# Altium PCB FreidoraAireCukiMicro.PcbDoc
Units mil, origin at the board's own origin, x right, y up, seen from the top; angles counter-clockwise.
Board outline 3650 x 2850 mil, 2 copper layers (Top Layer, Bottom Layer); 65 components, 96 nets, 249 pads, 28 vias.
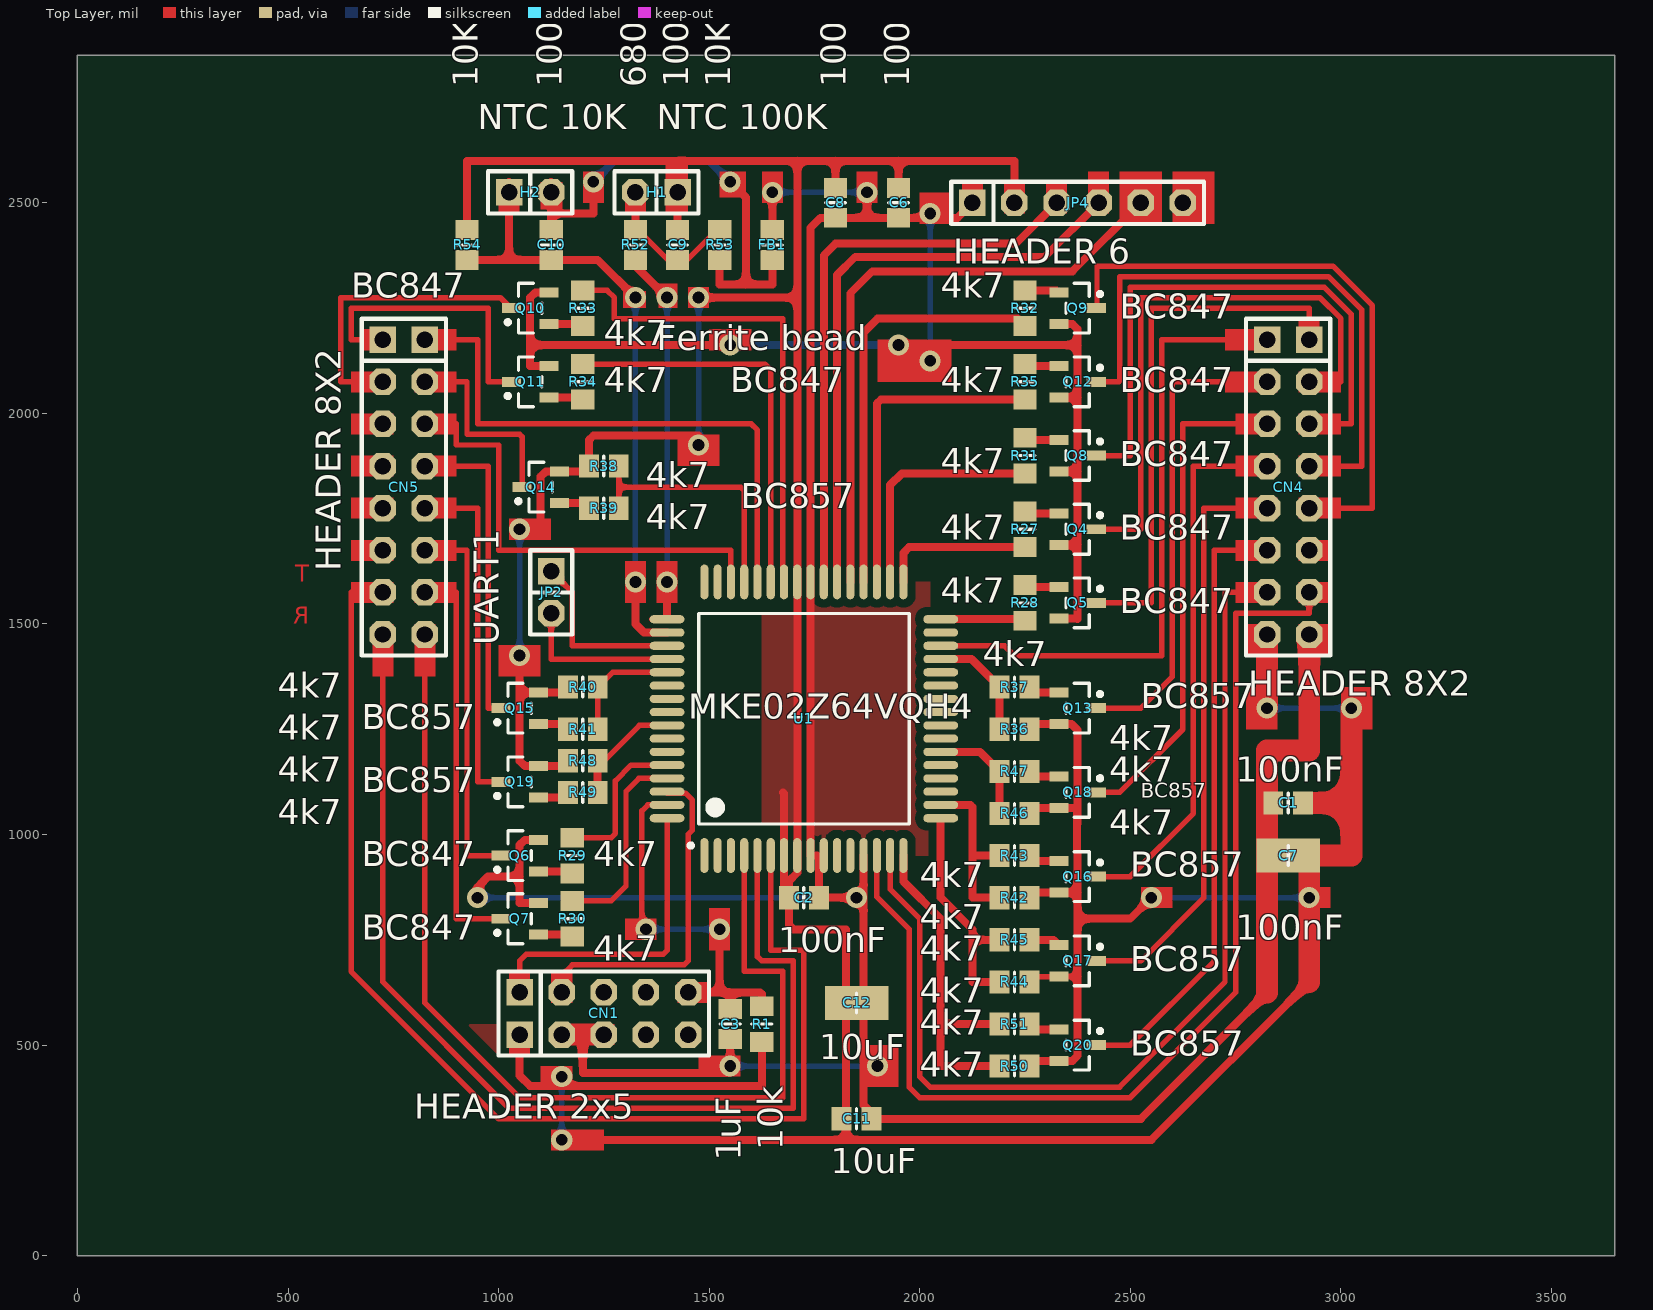
[diagram p0: Top Layer view]
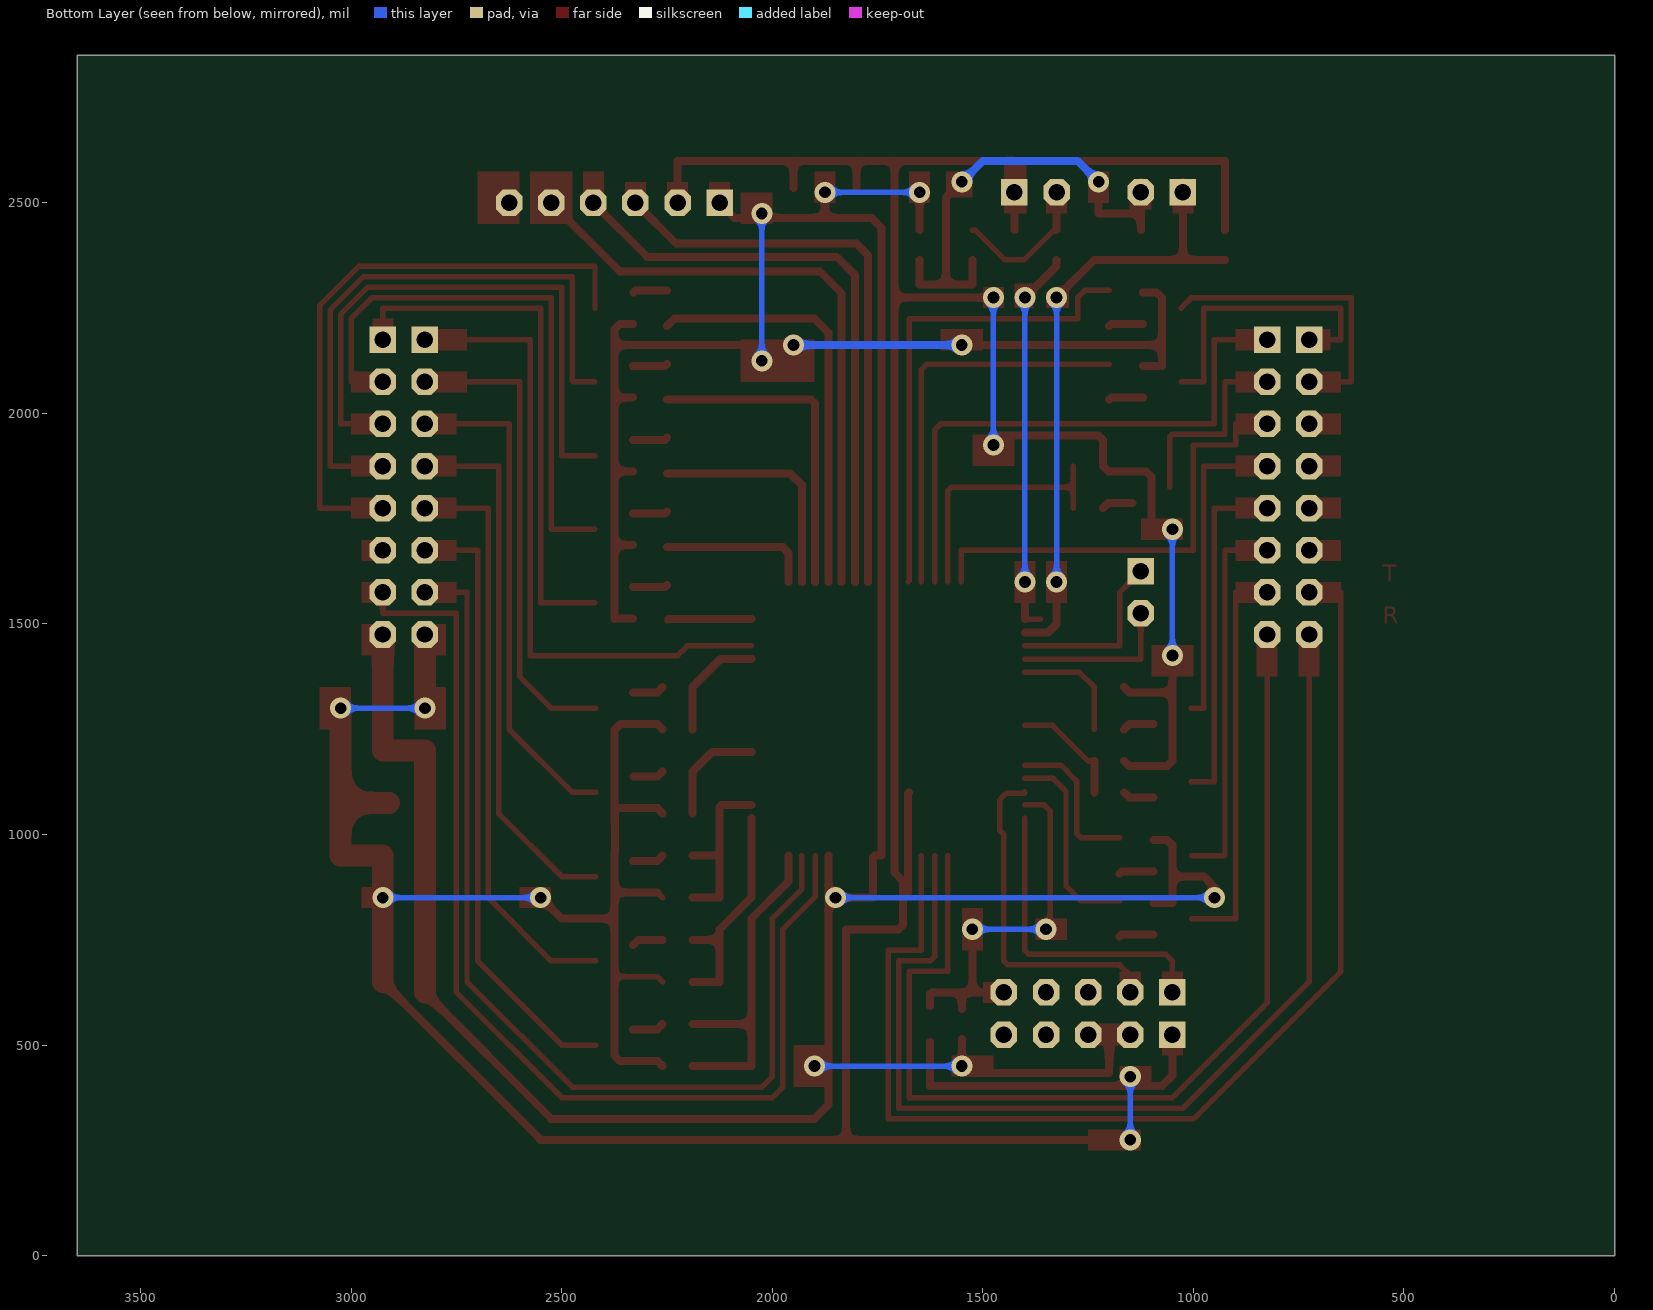
[diagram p1: Bottom Layer view, seen from below]

## Layer stack, top to bottom
Top Solder: solder mask 0.4, Solder Resist, Dk 3.5
Top Layer: signal copper 1.4
Dielectric1: dielectric 12.6, FR-4, Dk 4.8
Bottom Layer: signal copper 1.4
Bottom Solder: solder mask 0.4, Solder Resist, Dk 3.5

## Board outline
0,0 3650,0 3650,2850 0,2850

## Design rules (kind name [scope] priority, off if disabled: settings)
Clearance POLIGONOS [InPoly] p1: gap=20
Clearance [All] p2: gap=12
Clearance Clearance_1 [All] p3 off: gap=10
ComponentClearance [All] p1 off: gap=10 collisioncheckmode=3 verticalgap=10 showdistances=FALSE
FabricationTestPointUsage TestPointUsage [All] p1 off: valid=0 allowmultiple=FALSE
FabricationTestpoint Testpoint [All] p1: side=3 testpointundercomponent=TRUE minsize=40 maxsize=100 preferedsize=60 minholesize=0 maxholesize=40 preferedholesize=32 testpointgrid=1 allowsidetop=TRUE allowsidebottom=TRUE usegrid=TRUE gridtolerance=0.01
HoleSize [All] p1: absolutevalues=TRUE maxlimit=200 minlimit=1 maxpercent=80.000 minpercent=20.000
MinimumSolderMaskSliver [All] p1 off: minsoldermaskwidth=10
PlaneConnect [All] p1: planeconnectstyle=Relief reliefexpansion=20 reliefentries=4 reliefconductorwidth=14 reliefairgap=10
PolygonConnect [All] p1: connectstyle=Relief reliefconductorwidth=10 reliefentries=4 polygonreliefangle="90 Angle" airgapwidth=10
RoomDefinition FreidoraAireCukiDigLeds [InComponentClass('FreidoraAireCukiDigLeds')] p1: confinementstyle=ConfineIn formatcopy=TRUE lockcomponents=FALSE outline -10675,-9825 -8675,-9825 -8675,-8825 -10675,-8825
RoomDefinition FreidoraAireCukiMicro [InComponentClass('FreidoraAireCukiMicro')] p2: confinementstyle=ConfineIn formatcopy=TRUE lockcomponents=FALSE outline -200,-225 3825,-225 3825,2950 -200,2950
RoutingCorners [All] p1: cornerstyle=45-Degree minsetback=25 maxsetback=100
RoutingLayers [All] p1: top layer_v5=FALSE bottom layer_v5=FALSE
RoutingPriority [All] p1: routingpriority=2
RoutingVias [All] p1: holewidth=28 width=50 viastyle="Through Hole" minholewidth=28 minwidth=50 maxholewidth=28 maxwidth=55
ShortCircuit [All] p1 off: allowed=FALSE
SilkToSilkClearance [All] p1 off: silktosilkclearance=10
SilkToSolderMaskClearance SilkscreenOverComponentPads [IsPad] p1 off: minsilkscreentomaskgap=10 clearancetoexposedcopper=TRUE
SolderMaskExpansion [All] p1: expansion=4
Width "Width 39" [All] p1 off: maxlimit=300 minlimit=13 preferedwidth=39
Width "Width 96" [All] p2 off: maxlimit=300 minlimit=12 preferedwidth=96
Width "Width 19" [All] p3: maxlimit=300 minlimit=12 preferedwidth=19
Width "Width 300" [All] p4 off: maxlimit=300 minlimit=10 preferedwidth=300
Width "Width 12" [All] p5 off: maxlimit=300 minlimit=10 preferedwidth=12
Width "Width 65" [All] p6 off: maxlimit=300 minlimit=10 preferedwidth=65
Width "Width 150" [All] p7 off: maxlimit=300 minlimit=10 preferedwidth=150
Width "Width 26" [All] p8 off: maxlimit=300 minlimit=10 preferedwidth=26
Width "Width 13" [All] p9 off: maxlimit=300 minlimit=10 preferedwidth=13
Width "Width 52" [All] p10 off: maxlimit=300 minlimit=10 preferedwidth=52
18 further rules are at their usual default settings.

## Components (designator, comment, footprint, x,y, rotation, side; value= is the part's Value field where it differs from the comment)
C1 "100nF" C-0805_N#1 2875,1075 r180 top
C2 "100nF" C-0805_N#1 1725,850 r0 top
C3 "1uF" C-0805_N#1 1550,550 r270 top
C6 "100nF" C-0805_N#1 1950,2500 r270 top
C7 "100nF" C-0805_N#2 2875,950 r180 top
C8 "100nF" C-0805_N#1 1800,2500 r270 top
C9 "100nF" C-0805_N#1 1425,2400 r90 top
C10 "100nF" C-0805_N#1 1125,2400 r270 top
C11 "10uF" C-0805_N#1 1850,325 r180 top
C12 "10uF" C-0805_N#2 1850,600 r180 top
CN1 "HEADER 2x5" SIP2X5 1050,525 r180 top
CN4 "HEADER 8X2" SIP2X8 2825,2175 r90 top
CN5 "HEADER 8X2" SIP2X8 725,2175 r90 top
FB1 "Ferrite bead" C-0805_N#1 1650,2400 r270 top
H1 "NTC 100K" SIP2 1425,2525 r180 top
H2 "NTC 10K" SIP2 1025,2525 r0 top
JP2 "UART1" SIP2 1125,1625 r270 top
JP4 "HEADER 6" SIP6 2125,2500 r0 top
Q4 "BC847" SOT23_N 2375,1725 r0 top
Q5 "BC847" SOT23_N 2375,1550 r0 top
Q6 "BC847" SOT23_N 1050,950 r180 top
Q7 "BC847" SOT23_N 1050,800 r180 top
Q8 "BC847" SOT23_N 2375,1900 r0 top
Q9 "BC847" SOT23_N 2375,2250 r0 top
Q10 "BC847" SOT23_N 1075,2250 r180 top
Q11 "BC847" SOT23_N 1075,2075 r180 top
Q12 "BC847" SOT23_N 2375,2075 r0 top
Q13 "BC857" SOT23_N 2375,1300 r0 top
Q14 "BC857" SOT23_N 1100,1825 r180 top
Q15 "BC857" SOT23_N 1050,1300 r180 top
Q16 "BC857" SOT23_N 2375,900 r0 top
Q17 "BC857" SOT23_N 2375,700 r0 top
Q18 "BC857" SOT23_N 2375,1100 r0 top
Q19 "BC857" SOT23_N 1050,1125 r180 top
Q20 "BC857" SOT23_N 2375,500 r0 top
R1 "10k" R-0805_N_WAVE 1625,550 r270 top
R27 "4k7" R-0805_N_WAVE 2250,1725 r270 top
R28 "4k7" R-0805_N_WAVE 2250,1550 r270 top
R29 "4k7" R-0805_N_WAVE 1175,950 r90 top
R30 "4k7" R-0805_N_WAVE 1175,800 r90 top
R31 "4k7" R-0805_N_WAVE 2250,1900 r270 top
R32 "4k7" R-0805_N_WAVE 2250,2250 r270 top
R33 "4k7" R-0805_N_WAVE 1200,2250 r90 top
R34 "4k7" R-0805_N_WAVE 1200,2075 r90 top
R35 "4k7" R-0805_N_WAVE 2250,2075 r270 top
R36 "4k7" R-0805_N 2225,1250 r0 top
R37 "4k7" R-0805_N 2225,1350 r0 top
R38 "4k7" R-0805_N 1250,1875 r180 top
R39 "4k7" R-0805_N 1250,1775 r180 top
R40 "4k7" R-0805_N 1200,1350 r180 top
R41 "4k7" R-0805_N 1200,1250 r180 top
R42 "4k7" R-0805_N 2225,850 r0 top
R43 "4k7" R-0805_N 2225,950 r0 top
R44 "4k7" R-0805_N 2225,650 r0 top
R45 "4k7" R-0805_N 2225,750 r0 top
R46 "4k7" R-0805_N 2225,1050 r0 top
R47 "4k7" R-0805_N 2225,1150 r0 top
R48 "4k7" R-0805_N 1200,1175 r180 top
R49 "4k7" R-0805_N 1200,1100 r180 top
R50 "4k7" R-0805_N 2225,450 r0 top
R51 "4k7" R-0805_N 2225,550 r0 top
R52 "680" R-0805_N 1325,2400 r270 top
R53 "10K" R-0805_N 1525,2400 r90 top
R54 "10K" R-0805_N 925,2400 r90 top
U1 "MKE02Z64VQH4" QFP64 1725,1275 r90 top

## Footprints (in the part's own frame and the unit in brackets; to place one, negate y for a bottom-side part, rotate by r counter-clockwise, add the part's x,y. Pads: shape width x height; smd on the part's side, far side on the other; paste and mask are expansions set on the pad)
C-0805_N#1 [mm] "Chip Capacitor, Body 2.0x1.2mm, IPC Medium Density"
  rect 1.2x1.4 smd: 1(-0.9,0) 2(0.9,0)
  silkscreen extent 0,-0.6 0,0.6, body extent -1.1,-0.72 1.1,0.73, height 1.34
C-0805_N#2 [mm] "Chip Capacitor, Body 2.0x1.2mm, IPC Medium Density"
  rect 2.032x2.032 smd: 1(-0.9,0) 2(0.9,0)
  silkscreen extent 0,-0.6 0,0.6, body extent -1.1,-0.72 1.1,0.73, height 1.34
QFP64 [mm] "QFP, 64-Leads, Body 14x14mm, Pitch 0.8mm, IPC Medium Density"
  oval 2.1x0.489 smd: 1(-8.25,6) 2(-8.25,5.2) 3(-8.25,4.4) 4(-8.25,3.6) 5(-8.25,2.8) 6(-8.25,2) 7(-8.25,1.2) 8(-8.25,0.4) 9(-8.25,-0.4) 10(-8.25,-1.2) 11(-8.25,-2) 12(-8.25,-2.8) 13(-8.25,-3.6) 14(-8.25,-4.4) 15(-8.25,-5.2) 16(-8.25,-6) 33(8.25,-6) 34(8.25,-5.2) 35(8.25,-4.4) 36(8.25,-3.6) 37(8.25,-2.8) 38(8.25,-2) 39(8.25,-1.2) 40(8.25,-0.4) 41(8.25,0.4) 42(8.25,1.2) 43(8.25,2) 44(8.25,2.8) 45(8.25,3.6) 46(8.25,4.4) 47(8.25,5.2) 48(8.25,6)
  oval 0.489x2.1 smd: 17(-6,-8.25) 18(-5.2,-8.25) 19(-4.4,-8.25) 20(-3.6,-8.25) 21(-2.8,-8.25) 22(-2,-8.25) 23(-1.2,-8.25) 24(-0.4,-8.25) 25(0.4,-8.25) 26(1.2,-8.25) 27(2,-8.25) 28(2.8,-8.25) 29(3.6,-8.25) 30(4.4,-8.25) 31(5.2,-8.25) 32(6,-8.25) 49(6,8.25) 50(5.2,8.25) 51(4.4,8.25) 52(3.6,8.25) 53(2.8,8.25) 54(2,8.25) 55(1.2,8.25) 56(0.4,8.25) 57(-0.4,8.25) 58(-1.2,8.25) 59(-2,8.25) 60(-2.8,8.25) 61(-3.6,8.25) 62(-4.4,8.25) 63(-5.2,8.25) 64(-6,8.25)
  silkscreen extent -7.77,-6.35 6.35,6.95, body extent -7.9,-7.9 7.9,7.9, height 2.9
R-0805_N [mm] "Chip Resistor, Body 2.0x1.2mm, IPC Medium Density"
  rect 1.2x1.4 smd: 1(-0.9,0) 2(0.9,0)
  silkscreen extent 0,-0.6 0,0.6, body extent -1.1,-0.67 1.1,0.68, height 0.69
R-0805_N_WAVE [mm] "Chip Resistor, Body 2.0x1.2mm, IPC Medium Density, Wave soldering"
  rect 1.2x1.4 smd: 1(-1.075,0) 2(1.075,0)
  silkscreen extent 0,-0.6 0,0.6, body extent -1.1,-0.67 1.1,0.68, height 0.69
SIP2 [mil]
  rect 63x63 hole 39: 1(0,0)
  oct 63x63 hole 39: 2(100,0)
  silkscreen extent -50,-50 150,50
SIP2X5 [mil]
  rect 63x63 hole 39: 1(0,0) 2(0,-100)
  oct 63x63 hole 39: 3(-100,0) 4(-100,-100) 5(-200,0) 6(-200,-100) 7(-300,0) 8(-300,-100) 9(-400,0) 10(-400,-100)
  silkscreen extent -450,-150 50,50, body extent -450,-148 50,48, height 336
SIP2X8 [mil]
  rect 63x63 hole 39: 1(0,0) 2(0,-100)
  oct 63x63 hole 39: 3(-100,0) 4(-100,-100) 5(-200,0) 6(-200,-100) 7(-300,0) 8(-300,-100) 9(-400,0) 10(-400,-100) 11(-500,0) 12(-500,-100) 13(-600,0) 14(-600,-100) 15(-700,0) 16(-700,-100)
  silkscreen extent -750,-150 50,50
SIP6 [mil]
  rect 63x63 hole 39: 1(0,0)
  oct 63x63 hole 39: 2(100,0) 3(200,0) 4(300,0) 5(400,0) 6(500,0)
  silkscreen extent -50,-50 550,50
SOT23_N [mm] "SOT23, 3-Leads, Body 2.9x1.3mm, Pitch 0.95mm, Lead Span 2.3mm - Reverse Pinning, IPC Medium Density"
  rect 1.15x0.6 smd: 1(-1.125,0.95) 2(-1.125,-0.95) 3(1.125,0)
  silkscreen extent -0.7,-1.5 1.48,1.5, body extent -1.4,-1.45 1.4,1.45, height 1.29

## Part data
C1 C2 C3 C6 C7 C8 C9 C10 C11 C12: library part CAP, "Non polarized capacitor"
CN1: library part "HEADER 5X2"
CN4 CN5: "HEADER DE 2 X8"
H1 H2 JP2: library part "HEADER 2"
Q4 Q5 Q6 Q7 Q8 Q9 Q10 Q11 Q12: "NPN transistor bipolar"
Q13 Q14 Q15 Q16 Q17 Q18 Q19 Q20: "PNP bipolar transistor"
R1 R27 R28 R29 R30 R31 R32 R33 R34 R35 R36 R37 R38 R39 R40 R41 R42 R43 R44 R45 R46 R47 R48 R49 R50 R51 R52 R53 R54: library part "Res SMD 0805", "Resistor SMD 0805"
U1: "IC MCU 32BIT 64KB FLASH 64QFP"

## Via types
v1: diameter 50, hole 28, Top Layer to Bottom Layer, 28 vias

## Nets (pads, with @x,y where several pads share a name; then routed paths per layer and width w, separated by ;. In a path a pad name is that pad's centre, name@x,y a point inside that pad or via, vN(x,y) a via of type N, cw(c..) or ccw(c..) an arc to the next point about the centre after c; other vN are vias at no path point)
A: R36.1 R37.1 U1.29 | length 267.4
  Top Layer w19: U1.29 2122.83,1416.73 R37.1 R36.1
AGND: C10.1 FB1.2 H2.2 R53.1 | length 1157.7
  Top Layer w19: C10.1 1125,2475 ; H2.2@1125,2550 1125,2475 ; v1(1225,2550) 1225,2475 1125,2475 ; R53.1 1525,2306 1587.5,2306 ; v1(1550,2550) 1587.5,2512.5 1587.5,2306 ; FB1.2 1650,2306 1587.5,2306
  Bottom Layer w19: v1(1225,2550) 1275,2600 1500,2600 v1(1550,2550)
B: R38.1 R39.1 U1.45 | length 618.2
  Top Layer w13: R39.1 1285.43,1825 ; R38.1 1285.43,1825 ; U1.45 1583.27,1816.73 1575,1825 1285.43,1825
BAJAR: CN4.14 U1.14 | length 2595.9
  Top Layer w13: U1.14 1898.23,851.77 1974.8,775.2 1974.8,400.2 2000,375 2500,375 2750,625 2750,1525 2925,1525 CN4.14
BUZZER: JP4.3 U1.39 | length 1379.9
  Top Layer w19: U1.39 1772.24,2375.24 1800,2403 2228,2403 JP4.3
C: R40.1 R41.1 U1.53 | length 279.4
  Top Layer w13: R41.1 R40.1 1270.67,1385.24 U1.53
D: R42.1 R43.1 U1.18 | length 421.8
  Top Layer w19: U1.18 2120.28,1070.28 2125,1065.55 2125,950 ; R42.1 2125,850 2125,950 ; R43.1 2125,950
DIG1: 
DIG2: 
DIG3: 
DIGITO1: CN4.1 U1.30 | length 1534.8
  Top Layer w13: U1.30 2201.77,1448.23 2225,1425 2575,1425 2575,2175 CN4.1
DIGITO2: CN5.2 U1.44 | length 1356.3
  Top Layer w13: CN5.2 950,2175 950,1975 1600,1975 1614.76,1960.24 U1.44
DIGITO3: CN5.6 U1.46 | length 1102
  Top Layer w13: CN5.6 900,1975 900,1925 1000,1925 1000,1675 1551.77,1675 U1.46
DP: R50.1 R51.1 U1.16 | length 816.1
  Top Layer w19: U1.16 1961.22,888.78 2050,800 2050,550 ; R50.1 2050,450 2050,550 ; R51.1 2050,550
E: R44.1 R45.1 U1.17 | length 549.1
  Top Layer w19: U1.17 2049.8,850.2 2125,775 2125,750 ; R44.1 2125,650 2125,750 ; R45.1 2125,750
F: R46.1 R47.1 U1.22 | length 258.9
  Top Layer w19: U1.22 2143.31,1196.26 R47.1 R46.1
FAN: JP4.4 U1.38 | length 1443.1
  Top Layer w19: U1.38 1803.74,2328.74 1847,2372 2297,2372 JP4.4 JP4.4@2425,2478
G: R48.1 R49.1 U1.57 | length 274.7
  Top Layer w13: R48.1 1250,1175 1334.25,1259.25 U1.57
  Top Layer w19: R49.1 R48.1
GND: C1.2 C2.2 C3.2 C6.2 C7.2 C8.2 C11.1 C12.1 CN1.3 CN1.5 CN4.16 FB1.1 JP4.1 Q4.2 Q5.2 Q6.2 Q7.2 Q8.2 Q9.2 Q10.2 Q11.2 Q12.2 U1.9 U1.10 U1.13 U1.40 | length 10231.6
  Top Layer w19: v1(950,850) 950,875 975,900 1050,900 ; 1075,2162.44 v1(1550,2162.44) ; Q7.2 1050,837.4 1050,900 ; Q6.2 1062.4,987.4 1050,975 1050,900 ; Q11.2 1075,2112.4 1075,2275 1087.4,2287.4 Q10.2 ; 1200,525 1200,434 1550,434 C3.2 ; FB1.1 v1(1650,2525) ; U1.13 v1@1866.73,850 ; v1(1875,2525) 1875,2464.57 ; v1(1950,2162.44) 2025,2162.44 ; v1(2025,2125) 2025,2162.44 ; v1(2025,2475) v1@2025,2464.57 ; JP4.1 2089.57,2464.57 v1@2025,2464.57 ; Q5.2 2374.22,1512.6 2375,1511.81 2375,1687.6 ; Q4.2 2375,1687.6 ; Q8.2 2375,1862.6 ; Q12.2 2375,2037.6 ; Q9.2 2362.4,2212.6 2375,2200 2375,2037.6 ; 2375,2162.44 2025,2162.44 ; 2825,625 2525,325 1900,325 1866.73,358.27 v1@1866.73,850 ; v1@1866.73,850 C2.2 1760.43,946.26 1756.5,950.2 U1.9 U1.40 1740.75,2440.75 1764.57,2464.57 C8.2 1875,2464.57 ; 1875,2464.57 C6.2 v1@2025,2464.57 ; 2375,1687.6 2375,1862.6 ; 2375,1862.6 2375,2037.6
  Top Layer w52: CN1.3 1200,525 CN1.5 ; 2825,625 2825,1200 2925,1200 CN4.16
  Bottom Layer w13: v1(950,850) v1(1850,850) ; v1(1550,450) v1(1900,450) ; v1(1650,2525) v1(1875,2525) ; v1(2025,2125) v1(2025,2475)
  Bottom Layer w19: v1(1550,2162.44) v1@1937.56,2162.44
HEAT: JP4.5 U1.37 | length 1464.2
  Top Layer w19: U1.37 1835.24,2285.24 1887.44,2337.44 2362.44,2337.44 JP4.5
LED1: R27.2 U1.33 | length 363.6
  Top Layer w19: U1.33 1961.22,1668.9 1975,1682.68 R27.2
LED1_DR: CN4.4 Q4.3 | length 1374.6
  Top Layer w13: Q4.3@2421.06,1725 2525,1725 2525,2275 2950,2275 3000,2225 3000,2075 CN4.4
LED2: R28.2 U1.32 | length 201.7
  Top Layer w13: R28.2@2246.46,1511.22 R28.2
  Top Layer w19: U1.32 R28.2@2246.46,1511.22
LED2_DR: CN4.2 Q5.3 | length 1278.9
  Top Layer w13: Q5.3@2421.06,1550 2550,1550 2550,2250 2925,2250 CN4.2
LED3: R29.2 U1.60 | length 369.8
  Top Layer w13: R29.2 1267.32,992.32 1277.56,1002.56 1277.56,1127.56 1314.76,1164.76 U1.60
LED3_DR: CN5.12 Q6.3 | length 903.9
  Top Layer w13: CN5.12 925,1675 925,950 Q6.3@1003.94,950
LED4: R30.2 U1.61 | length 477.5
  Top Layer w13: R30.2 1267.32,842.32 1302.56,877.56 1302.56,1102.56 1333.27,1133.27 U1.61
LED4_DR: CN5.14 Q7.3 | length 953.9
  Top Layer w13: CN5.14 900,1575 900,800 Q7.3@1003.94,800
LED5: R31.2 U1.34 | length 561.8
  Top Layer w19: U1.34 1929.72,1829.72 1957.68,1857.68 R31.2
LED5_DR: CN4.6 Q8.3 | length 1391.1
  Top Layer w13: Q8.3@2421.06,1900 2500,1900 2500,2300 2960.36,2300 3025,2235.36 3025,1975 CN4.6
LED6: R32.2 U1.36 | length 996.2
  Top Layer w19: U1.36 1866.73,2191.73 1900,2225 2232.68,2225 R32.2
LED6_DR: CN4.10 Q9.3 | length 1425.5
  Top Layer w13: Q9.3@2421.06,2250 2421.06,2346.06 2425,2350 ; 2421.06,2350 2981.07,2350 3075,2256.07 3075,1775 CN4.10
LED7: R33.2 U1.42 | length 1158.5
  Top Layer w13: R33.2 1257.68,2292.32 1275,2275 1275,2225 1675,2225 1675,1602.56 U1.42
LED7_DR: CN5.3 Q10.3 | length 714.3
  Top Layer w13: CN5.3 625,2075 625,2275 1003.94,2275 Q10.3@1028.94,2250
LED8: R34.2 U1.43 | length 955.8
  Top Layer w13: R34.2 1632.68,2117.32 1646.26,2103.74 U1.43
LED8_DR: CN5.1 Q11.3 | length 703.9
  Top Layer w13: CN5.1 650,2175 650,2250 975,2250 975,2075 Q11.3@1028.94,2075
LED9: R35.2 U1.35 | length 779.1
  Top Layer w19: U1.35 1898.23,2023.23 1907.68,2032.68 R35.2
LED9_DR: CN4.8 Q12.3 | length 1406.3
  Top Layer w13: Q12.3@2421.06,2075 2473.03,2075 2475,2076.97 2475,2325 2970.71,2325 3050,2245.71 3050,1875 CN4.8
MODO: CN5.16 U1.4 | length 2485.1
  Top Layer w13: CN5.16 825,600 1050,375 1675,375 1675,675 1583.27,675 U1.4
NetC9_1: C9.1 H1.2 R52.1 R53.2 | length 348.3
  Top Layer w13: R52.1 1331.48,2435.43 1402.34,2364.57 C9.1 1447.66,2364.57 1518.52,2435.43 R53.2
  Top Layer w19: R52.1 H1.2
NetDG1_1: 
NetDG1_2: 
NetDG1_3: 
NetDG1_4: 
NetDG1_5: 
NetDG1_7: 
NetDG1_10: 
NetDG1_11: 
NetJP2_1: JP2.1 U1.51 | length 422.7
  Top Layer w13: JP2.1 1175,1575 1175,1448.23 U1.51
NetJP2_2: JP2.2 U1.52 | length 383.5
  Top Layer w13: JP2.2 1125,1416.73 U1.52
NetLED1_1: 
NetLED2_1: 
NetLED3_1: 
NetLED4_1: 
NetLED5_1: 
NetLED6_1: 
NetLED7_1: 
NetLED8_1: 
NetLED9_1: 
NetQ1_1: 
NetQ2_1: 
NetQ3_1: 
NetQ4_1: Q4.1 R27.1 | length 82.7
  Top Layer w19: R27.1 2254.92,1762.4 Q4.1
NetQ5_1: Q5.1 R28.1 | length 82.7
  Top Layer w19: R28.1 2254.92,1587.4 Q5.1
NetQ6_1: Q6.1 R29.1 | length 82.7
  Top Layer w19: Q6.1 1170.08,912.6 R29.1
NetQ7_1: Q7.1 R30.1 | length 82.7
  Top Layer w19: Q7.1 1170.08,762.6 R30.1
NetQ8_1: Q8.1 R31.1 | length 82.7
  Top Layer w19: R31.1 2254.92,1937.4 Q8.1
NetQ9_1: Q9.1 R32.1 | length 81.8
  Top Layer w19: R32.1 2324.8,2292.32 Q9.1@2329.72,2287.4
NetQ10_1: Q10.1 R33.1 | length 82.7
  Top Layer w19: Q10.1 1195.08,2212.6 R33.1
NetQ11_1: Q11.1 R34.1 | length 82.7
  Top Layer w19: Q11.1 1195.08,2037.6 R34.1
NetQ12_1: Q12.1 R35.1 | length 82.7
  Top Layer w19: R35.1 2254.92,2112.4 Q12.1
NetQ13_1: Q13.1 R37.2 | length 75.5
  Top Layer w19: R37.2 2273.03,1337.4 Q13.1
NetQ14_1: Q14.1 R39.2 | length 75.5
  Top Layer w19: Q14.1 1201.97,1787.6 R39.2
NetQ15_1: Q15.1 R41.2 | length 75.5
  Top Layer w19: Q15.1 1151.97,1262.6 R41.2
NetQ16_1: Q16.1 R43.2 | length 75.5
  Top Layer w19: R43.2 2273.03,937.4 Q16.1
NetQ17_1: Q17.1 R45.2 | length 75.5
  Top Layer w19: R45.2 2318.11,750 Q17.1
NetQ18_1: Q18.1 R47.2 | length 74.5
  Top Layer w19: R47.2 2273.03,1137.4 Q18.1@2329.72,1137.4
NetQ19_1: Q19.1 R49.2 | length 75.4
  Top Layer w19: Q19.1 1152.17,1087.6 R49.2
NetQ20_1: Q20.1 R51.2 | length 75.5
  Top Layer w19: R51.2 2273.03,537.4 Q20.1
NTC_10K: C10.2 H2.1 R54.1 U1.50 | length 1570.7
  Top Layer w19: R54.1 1025,2364.57 ; H2.1@1025,2550 1025,2364.57 ; C10.2 1235.43,2364.57 v1(1325,2275) ; 1214.57,2364.57 1025,2364.57 ; v1(1325,1600) 1325,1500 1345.28,1479.72 U1.50
  Bottom Layer w13: v1(1325,1600) v1(1325,2275)
ONOFF: CN5.13 U1.6 | length 2948.9
  Top Layer w13: 650,825 650,1575 CN5.13 ; 650,875 650,675 1000,325 1725,325 1725,725 1646.26,725 U1.6
RESET: C3.1 CN1.10 R1.1 U1.63 | length 920.7
  Top Layer w13: v1(1350,775) 1340.36,784.64 1340.36,1055.91 1354.72,1070.28 U1.63
  Top Layer w19: CN1.10 1525,625 ; v1(1525,775) 1525,625 ; C3.1 1550,625 ; R1.1 1625,621.16 1621.16,625 1550,625 ; 1525,625 1550,625
  Bottom Layer w13: v1(1350,775) v1(1525,775)
SEG_A: CN4.3 Q13.3 | length 1136.8
  Top Layer w13: Q13.3 2525,1300 2600,1375 2600,2075 CN4.3
SEG_B: CN5.4 Q14.3 | length 477.4
  Top Layer w13: CN5.4 925,2075 925,1950 1050,1950 1055.71,1944.29 Q14.3
SEG_C: CN5.8 Q15.3 | length 755.7
  Top Layer w13: CN5.8 975,1875 975,1300 Q15.3
SEG_D: CN4.7 Q16.3 | length 1292.8
  Top Layer w13: Q16.3 2500,900 2650,1050 2650,1875 CN4.7
SEG_DP: CN4.11 Q20.3 | length 1463.6
  Top Layer w13: Q20.3 2500,500 2700,700 2700,1675 CN4.11
SEG_E: CN4.9 Q17.3 | length 1392.8
  Top Layer w13: Q17.3 2525,700 2675,850 2675,1775 CN4.9
SEG_F: CN4.5 Q18.3 | length 1192.8
  Top Layer w13: Q18.3 2475,1100 2625,1250 2625,1975 CN4.5
SEG_G: CN5.10 Q19.3 | length 830.7
  Top Layer w13: CN5.10 950,1775 950,1125 Q19.3
SUBIR: CN4.13 U1.15 | length 2418.2
  Top Layer w13: U1.15 1929.72,870.28 1999.8,800.2 1999.8,425.2 2025,400 2475,400 2725,650 2725,1575 CN4.13
SWDCLK: CN1.4 U1.62 | length 810.9
  Top Layer w13: CN1.4 1150,665.56 1175,690.56 1440.56,690.56 1450,700 1450,1000.62 1460.04,1010.65 1460.04,1081.93 1443.56,1098.4 1400.2,1098.4 U1.62
SWDIO: CN1.2 U1.64 | length 749.2
  Top Layer w13: CN1.2 1050,700 1065.56,715.56 1390.56,715.56 1400,725 1400,874.8 1400.2,875 U1.64
TEMPERATURA: R52.2 U1.49 | length 920.9
  Top Layer w13: U1.49@1363.78,1511.22 U1.49
  Top Layer w19: R52.2 1325,2350 v1(1400,2275) ; v1(1400,1600) 1400.2,1599.8 U1.49
  Bottom Layer w13: v1(1400,1600) v1(1400,2275)
TIEMPO: CN5.15 U1.5 | length 2653.7
  Top Layer w13: 725,700 CN5.15 ; 725,750 725,650 1025,350 1700,350 1700,700 1625,700 1614.76,710.24 U1.5
VCC: C1.1 C2.1 C6.1 C7.1 C8.1 C9.2 C11.2 C12.2 CN1.1 CN4.15 H1.1 JP4.2 Q13.2 Q14.2 Q15.2 Q16.2 Q17.2 Q18.2 Q19.2 Q20.2 R1.2 R36.2 R38.2 R40.2 R42.2 R44.2 R46.2 R48.2 R50.2 R54.2 U1.7 U1.8 U1.41 | length 12751.8
  Top Layer w13: R44.2 2273.03,662.6 Q17.2 2374.85,662.6 ; R42.2 R42.2@2273.03,862.6
  Top Layer w19: R54.2 925,2600 1425,2600 ; CN1.1 1050,428 1075,403 1625,403 R1.2 ; 1050,1337.4 Q15.2 1151.97,1337.4 R40.2 ; v1(1050,1425) 1050,1175 1062.6,1162.4 Q19.2 1151.97,1162.4 R48.2 ; v1(1050,1725) 1100,1725 1100,1850 1112.4,1862.4 Q14.2 1201.97,1862.4 R38.2 1214.57,1936.57 1225,1947 1475,1947 v1(1475,1925) ; v1(1150,275) 1825,275 ; C9.2 H1.1@1425,2550 ; v1(1475,2275) 1709.25,2275 ; 1675,1100 1677.76,1097.24 U1.7 1677.76,861.81 C2.1 ; C8.1 1800,2600 ; C6.1 1950,2600 ; JP4.2 2225,2600 1950,2600 ; R50.2 2273.03,462.6 Q20.2 2362.6,462.6 2374.85,474.85 2374.85,662.6 2374.85,800 ; R46.2 2273.03,1062.6 Q18.2 2373.97,1062.6 2373.97,1025 ; R36.2 2273.03,1262.6 Q13.2 2360.43,1262.6 2374.85,1248.19 2374.85,1025.87 2373.97,1025 ; R42.2@2273.03,862.6 Q16.2 2374.85,862.6 ; v1(2550,850) 2500,800 2374.85,800 ; 2925,650 2550,275 1825,275 ; H1.1@1425,2550 1425,2600 ; H1.1@1425,2550 1425,2600 ; 1425,2600 1709.25,2600 ; C2.1 1689.57,889.57 1709.25,909.25 U1.8 U1.41 1709.25,2275 ; C2.1 1689.57,785.43 1700,775 1825,775 1825,275 ; 1709.25,2275 1709.25,2600 ; 1709.25,2600 1800,2600 ; 1800,2600 1950,2600 ; 2373.97,1025 2373.97,959.87 2374.85,958.99 2374.85,862.6 ; 2374.85,800 2374.85,862.6
  Top Layer w52: v1(2825,1300) CN4.15 ; C1.1 3025,1075 ; 2925,650 2925,950 3025,950 3025,1075 ; v1(3025,1300) 3025,1075
  Bottom Layer w13: v1(1050,1425) v1(1050,1725) ; v1(1150,275) v1(1150,425) ; v1(1475,1925) v1(1475,2275) ; v1(2550,850) v1(2925,850) ; v1(2825,1300) v1(3025,1300)
pads on no net: CN1.6 CN1.7 CN1.8 CN1.9 CN4.12 CN5.5 CN5.7 CN5.9 CN5.11 JP4.6 U1.1 U1.2 U1.3 U1.11 U1.12 U1.19 U1.20 U1.21 U1.23 U1.24 U1.25 U1.26 U1.27 U1.28 U1.31 U1.47 U1.48 U1.54 U1.55 U1.56 U1.58 U1.59

## Polygon pours and split planes (outlines as drawn)
VCC on Top Layer "Top Layer-No Net" (solid, pour order 7): 1709.25,1525 1625,1525 1625,1025 1709.25,1025 1709.25,1525
GND on Top Layer "Top Layer-No Net" (solid, pour order 5): 1740.75,1599.8 1740.94,1600 2025,1600 2025,950 1725,950 1725,1600 1725.2,1599.8 1740.75,1599.8
no net on Top Layer "Top Layer-No Net" (solid, pour order 3): 1000,500 1000,550 925,550 1000,475

## Other copper
Top Layer:
  rectangle net NTC_10K: 1300,1550 1350,1650
  rectangle net TEMPERATURA: 1375,1550 1425,1650
  rectangle net VCC: 1425,1875 1525,1950
  rectangle net GND: 1500,2150 1600,2200
  rectangle net GND: 1900,2075 2075,2175
  rectangle net GND: 2000,2450 2075,2525
  rectangle net AGND: 1200,2500 1250,2575
  rectangle net AGND: 1525,2512.5 1587.5,2575
  rectangle net VCC: 1025,1700 1125,1750
  rectangle net VCC: 1000,1375 1100,1450
  rectangle net RESET: 1300,750 1375,800
  rectangle net RESET: 1500,725 1550,825
  rectangle net VCC: 1125,250 1250,300
  rectangle net VCC: 1100,403 1175,450
  rectangle net GND: 1475,425 1575,475
  rectangle net GND: 1866.73,400 1950,500
  rectangle net VCC: 2525,825 2600,875
  rectangle net VCC: 2900,825 2975,875
  rectangle net VCC: 3000,1250 3075,1350
  rectangle net VCC: 2775,1250 2850,1350
  rectangle net GND: 1625,2500 1675,2550
  rectangle net GND: 1850,2500 1900,2575
  rectangle net GND: 1625,2507.15 1675,2575
  rectangle net DIGITO1: 2725,2150 2850,2200
  rectangle net SEG_A: 2725,2050 2850,2100
  rectangle net SEG_F: 2750,1950 2850,2000
  rectangle net SEG_D: 2750,1850 2850,1900
  rectangle net SEG_E: 2750,1750 2850,1800
  rectangle net SEG_DP: 2750,1650 2850,1700
  rectangle net SUBIR: 2750,1550 2850,1600
  rectangle net BAJAR: 2900,1550 2975,1600
  rectangle: 2900,1650 2975,1700
  rectangle net LED6_DR: 2900,1750 3000,1800
  rectangle net LED9_DR: 2900,1850 3000,1900
  rectangle net LED5_DR: 2900,1950 3000,2000
  rectangle net LED1_DR: 2900,2050 3000,2100
  rectangle net LED2_DR: 2900,2150 2950,2225
  rectangle net VCC: 2775,1425 2850,1500
  rectangle net GND: 2900,1425 2975,1500
  rectangle net TIEMPO: 700,1375 750,1500
  rectangle net MODO: 800,1375 850,1500
  rectangle net ONOFF: 650,1550 750,1600
  rectangle net LED4_DR: 800,1550 900,1600
  rectangle net LED3_DR: 825,1650 900,1700
  rectangle: 650,1650 750,1700
  rectangle: 650,1750 750,1800
  rectangle: 650,1850 750,1900
  rectangle: 650,1950 750,2000
  rectangle net SEG_G: 825,1750 900,1800
  rectangle net SEG_C: 825,1850 900,1900
  rectangle net DIGITO3: 825,1950 900,1975
  rectangle net DIGITO3: 825,1950 900,2000
  rectangle net SEG_B: 800,2050 900,2100
  rectangle net DIGITO2: 825,2150 900,2200
  rectangle net LED8_DR: 675,2150 725,2200
  rectangle net LED7_DR: 650,2050 725,2100
  rectangle net TEMPERATURA: 1379.76,2250 1425,2308.68
  rectangle net VCC: 1450,2250 1500,2300
  rectangle net NTC_10K: 1295.14,2250 1350,2290.69
  rectangle net SWDIO: 1025,600 1075,675
  rectangle net SWDCLK: 1125,600 1175,675
  rectangle net VCC: 1025,475 1075,550
  rectangle net GND: 1150,500 1275,550
  rectangle net RESET: 1425,600 1500,650
  rectangle: 2600,2450 2700,2575
  rectangle net HEAT: 2475,2450 2575,2575
  rectangle net FAN: 2400,2475 2450,2575
  rectangle net BUZZER: 2300,2475 2350,2550
  rectangle net VCC: 2200,2475 2250,2550
  rectangle net GND: 2100,2475 2150,2550
  rectangle net NTC_10K: 1000,2475 1050,2550
  rectangle net AGND: 1100,2484.59 1151.7,2550
  rectangle net NetC9_1: 1300,2475 1350,2525
  rectangle net VCC: 1396.5,2475 1450,2590.5
  text "T" at 550,1600 h40
  text "R" at 550,1500 h40

## Silkscreen, mask and mechanical layers (free items; w line width, h text height)
Mechanical 1:
  lines w10: 150,254.06 170,194.06 ; 150,2575 170,2635 ; 160,194.06 180,194.06 ; 160,2635 180,2635 ; 170,1018.65 170,194.06 ; 170,1810.4 170,2635 ; 190,254.06 170,194.06 ; 190,2575 170,2635 ; 465,45 465,65 ; 525,35 465,55 ; 525,75 465,55 ; 1412.7,55 465,55 ; 2194.46,55 3142.17,55 ; 3082.17,35 3142.17,55 ; 3082.17,75 3142.17,55 ; 3142.17,45 3142.17,65
  text "2440.945 (mil)" at 205.99,1028.65 h60 r90
  text "2677.165 (mil)" at 1422.7,19.01 h60
Mechanical 4:
  lines w10: 472.83,1050 472.83,2122.83 ; 472.83,1075 ccw(c1348.92,1076.08) 1350,200 ; 472.83,1975 cw(c1210.33,2037.5) 785.81,2643.79 ; 784.06,2640.94 2840.94,2640.94 ; 1300,200 2275,200 ; 2272.83,200 ccw(c2273.92,1076.08) 3150,1075 ; 2837.03,2643.79 cw(c2412.5,2037.5) 3150,1975 ; 3150,1050 3150,2075
Mechanical 13:
  circle w10: c1761.42,401.97 r19.68
  circle w10: c1693.31,2168.5 r39.37
  circle w10: c1929.53,2168.5 r39.37
  circle w10: c1476.77,2089.76 r39.37
  circle w10: c2146.06,2089.76 r39.37
  circle w10: c1299.61,1971.65 r39.37
  circle w10: c2323.23,1971.65 r39.37
  circle w10: c1014.17,1174.21 r19.68
  circle w10: c2608.66,1499.21 r19.68
  circle w10: c1811.42,1499.21 r797.24
  circle w10: c1811.42,1971.65 r39.37
  circle w10: c1811.42,2522.83 r118.11
  circle w10: c3031.89,1223.62 r118.11
  circle w10: c590.94,1223.62 r118.11
  circle w10: c590.94,1223.62 r68.9
  circle w10: c3031.89,1223.62 r68.9
  circle w10: c1811.42,2522.83 r68.9
  lines w10: 472.83,2122.83 475,2125 ; 1368.5,1223.62 1368.5,1774.8 2254.33,1774.8 2254.33,1223.62 1368.5,1223.62